# EAGLE board calculator6 (EAGLE 9.6.2)
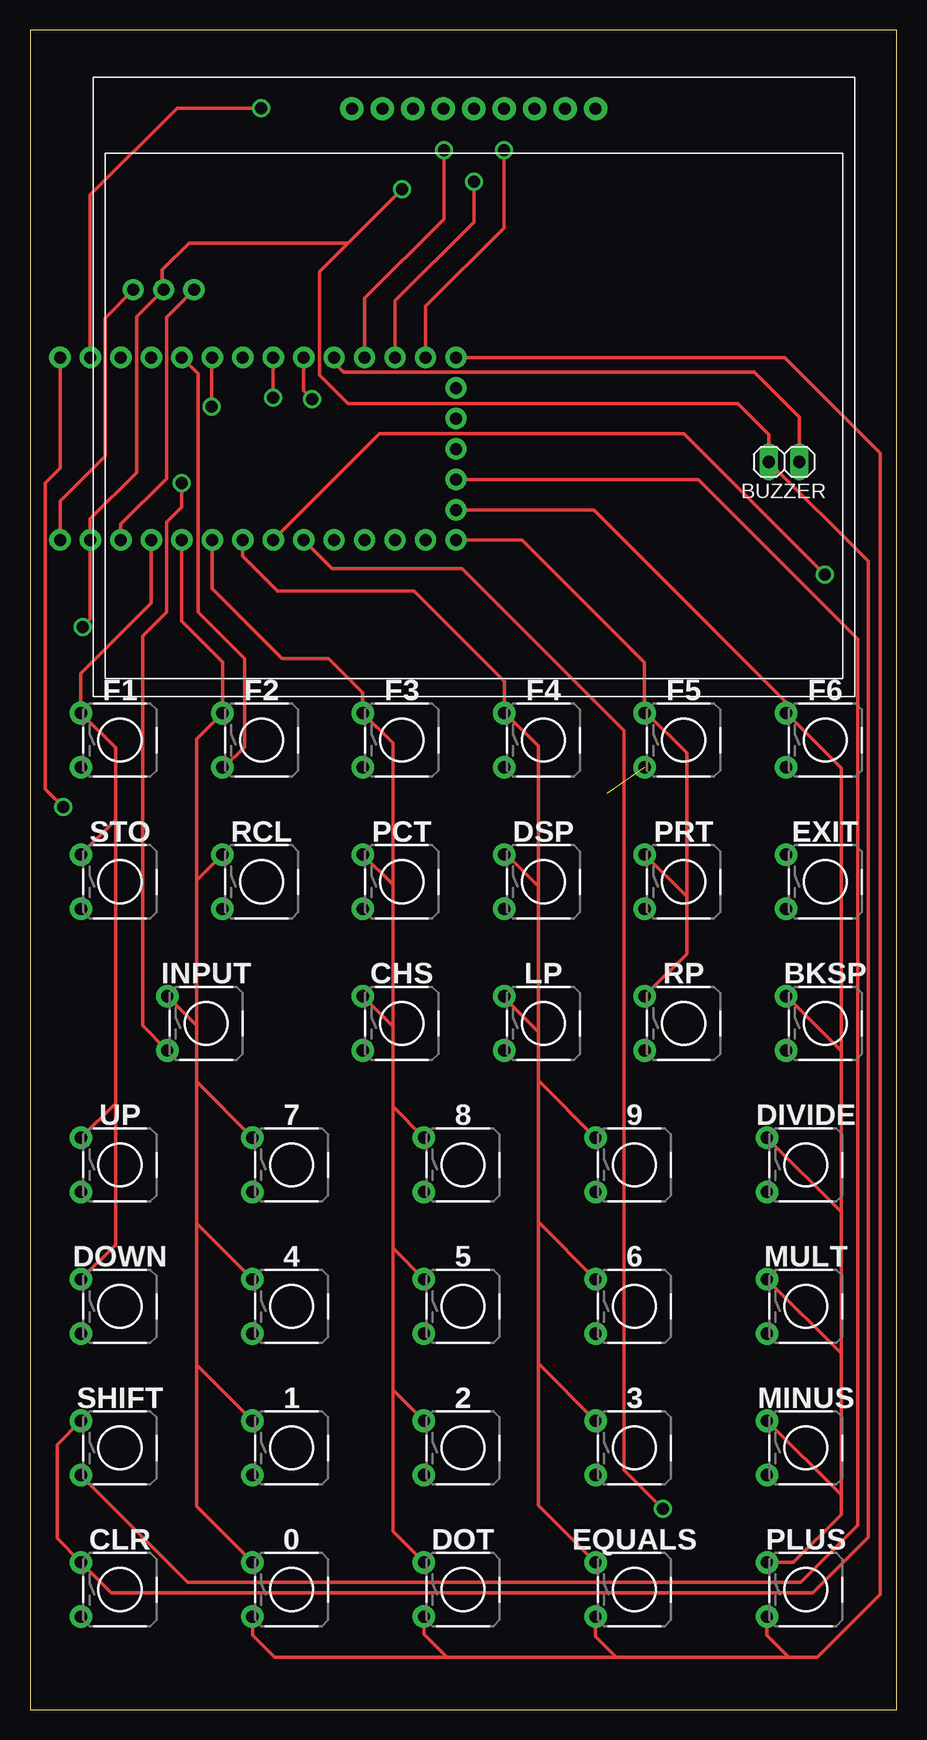
[diagram p0: board, top side]
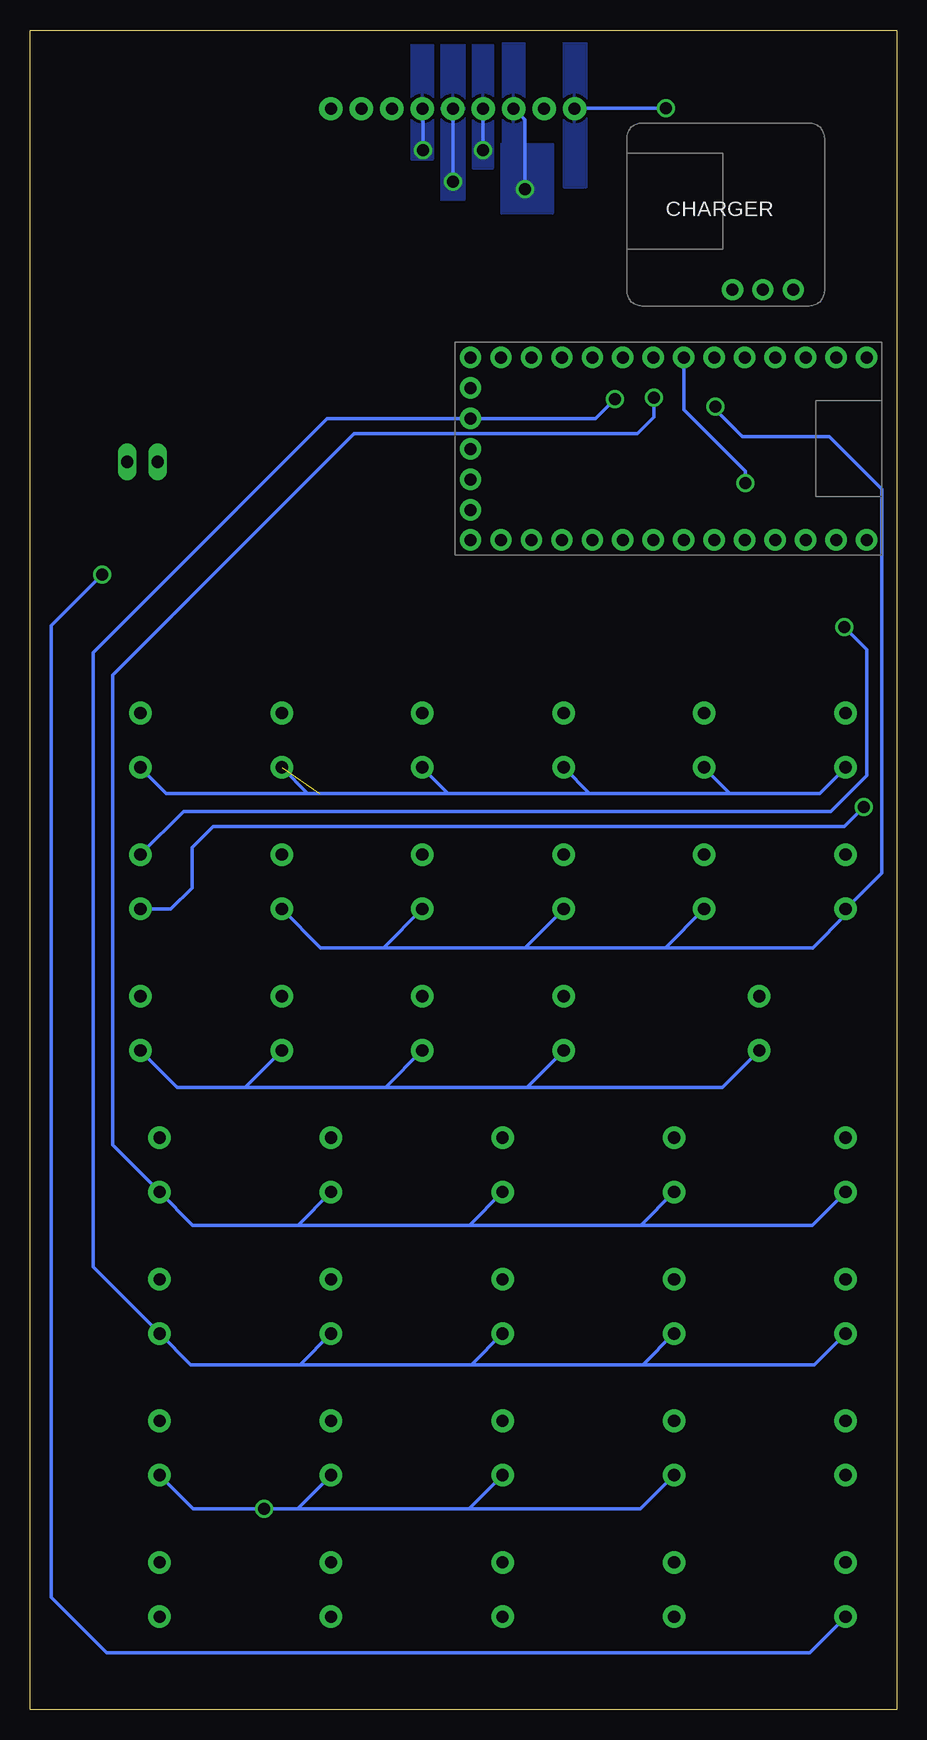
[diagram p1: board, bottom side, seen from below]

Size 72.25 x 140 mm. Coordinates in mm from the lower left corner, seen from the top.
Outline: 0,0 72.25,0 72.25,140 0,140 0,0
Copper layers (1*16): Top 0.035mm / dielectric 1.5mm / Bottom 0.035mm
Design rules "default": minimum track width 6mil, minimum drill 0.35mm, track to track 6mil, track to pad 6mil, pad to pad 6mil, via to via 6mil, smd to smd 6mil, copper to edge 40mil, drill to drill 6mil, minimum pad ring 10mil, minimum via ring 8mil, stop-mask expansion 4mil, vias tented up to drill 0mil, thermal gap 10mil

## Footprints (pad centres in the part's own frame; a part is rotated, then mirrored left to right if it is on the bottom)
BUTTON = drill 1.016 pad 1.88: 1 -3.251,2.261; 3 -3.251,-2.261
1X02 = drill 1.016 long: 1 -1.27,0; 2 1.27,0
LIPO_BACKPACK = drill 1 pad 1.778: 5V 7.68,13.9; BAT 2.6,13.9; GND 5.14,13.9
ITSYM4 = drill 1 pad 1.778: 0 34.27,16.5; 1 31.73,16.5; 2 34.27,1.3; 3 34.27,11.46; 3V3 3.79,1.3; 4 34.27,14; 5 24.11,16.5; 7 21.57,16.5; 9 19.03,16.5; 10 16.49,16.5; 11 13.95,16.5; 12 11.41,16.5; 13 8.87,16.5; A0 11.41,1.3; A1 13.95,1.3; A2 16.49,1.3; A3 19.03,1.3; A4 21.57,1.3; A5 24.11,1.3; AREF 6.33,1.3; BAT 1.25,16.5; DEBUG1 34.27,8.92; DEBUG2 34.27,6.38; EN 34.27,3.84; GND 3.79,16.5; MISO 31.73,1.3; MOSI 29.19,1.3; RST 1.25,1.3; SCK 26.65,1.3; SCL 26.65,16.5; SDA 29.19,16.5; USB 6.33,16.5; VHI 8.87,1.3
SHARPMEM = drill 1 pad 1.93: 3V3 -7.62,23.2; CLK -2.54,23.2; CS 2.54,23.2; DI 0,23.2; DISP 7.62,23.2; EIN 10.16,23.2; EMD 5.08,23.2; GND -5.08,23.2; VIN -10.16,23.2

## Placement (x,y rotation side)
0  BUTTON  [BUTTON]  21.8,10 0 top
1  BUTTON  [BUTTON]  21.8,21.8 0 top
2  BUTTON  [BUTTON]  36.1,21.8 0 top
3  BUTTON  [BUTTON]  50.4,21.8 0 top
4  BUTTON  [BUTTON]  21.8,33.6 0 top
5  BUTTON  [BUTTON]  36.1,33.6 0 top
6  BUTTON  [BUTTON]  50.4,33.6 0 top
7  BUTTON  [BUTTON]  21.8,45.4 0 top
8  BUTTON  [BUTTON]  36.1,45.4 0 top
9  BUTTON  [BUTTON]  50.4,45.4 0 top
BKSP  BUTTON  [BUTTON]  66.3,57.2 0 top
BUZZER  [1X02]  62.88,104 0 top
CHARGER  LIPO_BACKPACK  [LIPO_BACKPACK]  6,132.25 180 bottom
CHS  BUTTON  [BUTTON]  31,57.2 0 top
CLR  BUTTON  [BUTTON]  7.5,10 0 top
CONTROLLER  ITSYM4  [ITSYM4]  1.25,114 180 bottom
DIVIDE  BUTTON  [BUTTON]  64.7,45.4 0 top
DOT  BUTTON  [BUTTON]  36.1,10 0 top
DOWN  BUTTON  [BUTTON]  7.5,33.6 0 top
DSP  BUTTON  [BUTTON]  42.8,69 0 top
EQUALS  BUTTON  [BUTTON]  50.4,10 0 top
EXIT  BUTTON  [BUTTON]  66.3,69 0 top
F1  BUTTON  [BUTTON]  7.5,80.8 0 top
F2  BUTTON  [BUTTON]  19.3,80.8 0 top
F3  BUTTON  [BUTTON]  31,80.8 0 top
F4  BUTTON  [BUTTON]  42.8,80.8 0 top
F5  BUTTON  [BUTTON]  54.5,80.8 0 top
F6  BUTTON  [BUTTON]  66.3,80.8 0 top
INPUT  BUTTON  [BUTTON]  14.7,57.2 0 top
LP  BUTTON  [BUTTON]  42.8,57.2 0 top
MINUS  BUTTON  [BUTTON]  64.7,21.8 0 top
MULT  BUTTON  [BUTTON]  64.7,33.6 0 top
PCT  BUTTON  [BUTTON]  31,69 0 top
PLUS  BUTTON  [BUTTON]  64.7,10 0 top
PRT  BUTTON  [BUTTON]  54.5,69 0 top
RCL  BUTTON  [BUTTON]  19.3,69 0 top
RP  BUTTON  [BUTTON]  54.5,57.2 0 top
SHARPMEM  SHARPMEM  [SHARPMEM]  37,110.25 0 top
SHIFT  BUTTON  [BUTTON]  7.5,21.8 0 top
STO  BUTTON  [BUTTON]  7.5,69 0 top
UP  BUTTON  [BUTTON]  7.5,45.4 0 top

## Library data of the parts
0 1-9 BKSP CHARGER CHS CLR CONTROLLER DIVIDE DOT DOWN DSP EQUALS EXIT F1-F6 INPUT LP MINUS MULT PCT PLUS PRT RCL RP SHARPMEM SHIFT STO UP = aaa_pw
BUZZER = pinhead

## Nets
3V3: CONTROLLER.3V3 SHARPMEM.VIN
BAT: CHARGER.BAT CONTROLLER.BAT
BUZZER: BUZZER.2 CONTROLLER.A5
CLEAR: CLR.3 CONTROLLER.9
COL1: CONTROLLER.13 DOWN.1 F1.1 STO.1 UP.1
COL2: 0.1 1.1 4.1 7.1 CONTROLLER.12 F2.1 INPUT.1 RCL.1
COL3: 2.1 5.1 8.1 CHS.1 CONTROLLER.11 DOT.1 F3.1 PCT.1
COL4: 3.1 6.1 9.1 CONTROLLER.10 DSP.1 EQUALS.1 F4.1 LP.1
COL5: CONTROLLER.0 F5.1 PRT.1 RP.1
COL6: BKSP.1 CONTROLLER.4 DIVIDE.1 F6.1 MINUS.1 MULT.1 PLUS.1
CS: CONTROLLER.MISO SHARPMEM.CS
EXIT: CONTROLLER.RST EXIT.3
GND: BUZZER.1 CHARGER.GND CLR.1 CONTROLLER.GND EXIT.1 SHARPMEM.GND SHIFT.1
MOSI: CONTROLLER.MOSI SHARPMEM.DI
ROW1: CONTROLLER.A0 F1.3 F2.3 F3.3 F4.3 F5.3 F6.3
ROW2: CONTROLLER.A1 DSP.3 PCT.3 PRT.3 RCL.3 STO.3
ROW3: BKSP.3 CHS.3 CONTROLLER.A2 INPUT.3 LP.3 RP.3
ROW4: 7.3 8.3 9.3 CONTROLLER.A3 DIVIDE.3 UP.3
ROW5: 4.3 5.3 6.3 CONTROLLER.A4 DOWN.3 MULT.3
ROW6: 1.3 2.3 3.3 CONTROLLER.7 MINUS.3
ROW7: 0.3 CONTROLLER.2 DOT.3 EQUALS.3 PLUS.3
SCK: CONTROLLER.SCK SHARPMEM.CLK
SHIFT: CONTROLLER.3 SHIFT.3
VIN: CHARGER.5V CONTROLLER.USB

## Tracks (layer width: path | path; a pad name or v marks a point on that pad's centre or on a via)
3V3  (via drill 1 pad 1.3)
  Top 0.305: CONTROLLER.3V3 5.04,126.29 12.25,133.5 v19.25,133.5
  Bottom 0.305: v19.25,133.5 26.79,133.5 SHARPMEM.VIN
  pour Bottom: 27.75,126.88 27.75,139.75 25.88,139.75 25.88,126.88
BAT
  Top 0.305: CHARGER.BAT 6.25,116 6.25,104.5 2.5,100.75 CONTROLLER.BAT
BUZZER
  Top 0.305: CONTROLLER.A5 25.36,112.27 26.12,111.5 60.38,111.5 64.14,107.73 BUZZER.2
CLEAR  (via drill 1 pad 1.3)
  Top 0.305: CONTROLLER.9 29.16,106.38 54.5,106.38 v66.25,94.62
  Bottom 0.305: CLR.3 7.24,4.75 65.88,4.75 70.5,9.38 70.5,90.38 v66.25,94.62
COL1
  Top 0.305: CONTROLLER.13 10.12,92.25 4.25,86.37 F1.1 7.12,80.18 7.12,74.14 | DOWN.1 7.12,38.74 7.12,50.54 | 7.12,50.54 7.12,74.14 | UP.1 7.12,50.54 | STO.1 7.12,74.14
COL2
  Top 0.305: CONTROLLER.12 12.66,90.72 16.05,87.33 F2.1 13.88,80.89 13.88,69.09 | 0.1 13.88,16.93 13.88,28.73 | 13.88,28.73 13.88,40.53 | 13.88,40.53 13.88,52.33 | 13.88,52.33 13.88,57.03 | 13.88,57.03 13.88,69.09 | RCL.1 13.88,69.09 | INPUT.1 13.88,57.03 | 1.1 13.88,28.73 | 4.1 13.88,40.53 | 7.1 13.88,52.33
COL3
  Top 0.305: CONTROLLER.11 15.2,93.42 21,87.62 24.88,87.62 27.75,84.75 F3.1 30.25,80.56 30.25,68.76 | 2.1 30.25,26.66 | 30.25,26.66 30.25,38.46 | 30.25,38.46 30.25,50.26 | 30.25,50.26 30.25,57 | 30.25,57 30.25,68.76 | 5.1 30.25,38.46 | 8.1 30.25,50.26 | CHS.1 30.21,57 30.25,57 | PCT.1 30.25,68.76 | DOT.1 30.25,14.86 30.25,26.66
COL4
  Top 0.305: CONTROLLER.10 17.74,96.14 20.62,93.25 32,93.25 39.55,85.7 39.55,83.12 | 39.55,83.12 F4.1 | EQUALS.1 42.38,17.03 42.38,28.83 | 39.55,83.12 42.38,80.3 42.38,68.62 | 42.38,28.83 42.38,40.63 | 42.38,40.63 42.38,52.43 | 42.38,56.5 42.38,68.62 | 3.1 42.38,28.83 | 6.1 42.38,40.63 | 9.1 42.38,52.43 | 42.38,52.43 42.38,56.5 | 42.38,56.5 39.55,59.33 LP.1 | 42.38,68.62 39.74,71.26 DSP.1
COL5
  Top 0.305: CONTROLLER.0 41,97.5 51.25,87.25 51.25,83.25 | 51.25,83.25 F5.1 | RP.1 54.75,62.96 54.75,67.76 | 51.25,83.25 54.75,79.75 54.75,67.76 | PRT.1 54.75,67.76
COL6
  Top 0.305: CONTROLLER.4 47,100 63.05,83.95 F6.1 67.62,78.48 67.62,54.88 | PLUS.1 63.64,12.26 67.62,16.25 67.62,17.88 | 67.62,17.88 67.62,29.68 | 67.62,29.68 67.62,41.48 | 67.62,41.48 67.62,54.88 | BKSP.1 67.62,54.88 | DIVIDE.1 67.62,41.48 | MULT.1 67.62,29.68 | MINUS.1 67.62,17.88
CS  (via drill 1 pad 1.3)
  Top 0.305: CONTROLLER.MISO 32.98,116.98 39.5,123.5 v39.5,130
  Bottom 0.305: v39.5,130 39.5,133.41 SHARPMEM.CS
  pour Bottom: 38.62,129.25 38.62,138.75 40.5,138.75 40.5,129.25
EXIT  (via drill 1 pad 1.3)
  Top 0.305: CONTROLLER.RST 2.5,103.5 1.25,102.25 1.25,76.75 v2.75,75.25
  Bottom 0.305: v2.75,75.25 4.38,73.62 57,73.62 58.75,71.88 58.75,68.5 60.51,66.74 EXIT.3
GND  (via drill 1 pad 1.3)
  Top 0.305: CHARGER.GND 11.02,118.23 | 11.02,118.23 8.88,116.08 8.88,103.12 5.04,99.29 CONTROLLER.GND 5.04,90.92 v4.38,90.25 | SHIFT.1 2.25,22.06 2.25,14.26 CLR.1 6.76,9.75 65.25,9.75 69.88,14.38 69.88,95.73 BUZZER.1 61.6,106.27 59,108.88 26.5,108.88 24.12,111.25 24.12,119.88 26.5,122.25 | 26.5,122.25 13.25,122.25 11.02,120.02 11.02,118.23 | 26.5,122.25 v31,126.75
  Bottom 0.305: EXIT.1 59.43,74.88 5.5,74.88 2.5,77.88 2.5,88.38 v4.38,90.25 | SHARPMEM.GND 31,132.53 v31,126.75
  pour Bottom: 31,139.76 32.88,139.76 32.88,125 31,125
  pour Bottom: 28.62,124.75 28.62,130.5 33,130.5 33,124.75
MOSI  (via drill 1 pad 1.3)
  Top 0.305: CONTROLLER.MOSI 30.44,117.44 37,124 v37,127.38
  Bottom 0.305: v37,127.38 SHARPMEM.DI
  pour Bottom: 36,125.88 36,138.75 38,138.75 38,125.88
ROW1  (1 unrouted)
  Top 0.305: CONTROLLER.A0 14,111.36 14,91.5 17.88,87.62 17.88,80.25 16.16,78.54 F2.3
  Bottom 0.305: F6.3 60.88,76.38 48.08,76.38 | F1.3 6.41,76.38 13.88,76.38 | 37.38,76.38 49.08,76.38 F5.3 | 37.38,76.38 25.58,76.38 | 25.58,76.38 13.88,76.38 | F4.3 37.38,76.38 | F3.3 25.58,76.38 | F2.3 13.88,76.38
ROW2  (via drill 1 pad 1.3)
  Top 0.305: v15.12,108.62 15.12,112.62 CONTROLLER.A1
  Bottom 0.305: PRT.3 48.01,63.5 42.79,63.5 | 42.79,63.5 30.99,63.5 | 30.99,63.5 19.29,63.5 | 19.29,63.5 7,63.5 4.25,66.25 STO.3 1.25,69.74 1.25,101.75 5.62,106.12 12.88,106.12 15.12,108.38 v15.12,108.62 | RCL.3 19.29,63.5 | PCT.3 30.99,63.5 | DSP.3 42.79,63.5
ROW3  (via drill 1 pad 1.3)
  Top 0.305: INPUT.3 9.38,57.01 9.38,89.5 11.38,91.5 11.38,99 12.62,100.25 v12.62,102.25
  Bottom 0.305: BKSP.3 59.98,51.88 54.31,51.88 | INPUT.3 14.51,51.88 30.81,51.88 | 54.31,51.88 42.61,51.88 | 42.61,51.88 30.81,51.88 | CHS.3 30.81,51.88 | LP.3 42.61,51.88 | RP.3 54.31,51.88 | CONTROLLER.A2 17.74,108.36 12.62,103.25 v12.62,102.25
ROW4  (via drill 1 pad 1.3)
  Top 0.305: v20.25,109.38 20.25,112.67 CONTROLLER.A3
  Bottom 0.305: UP.3 7.01,40.38 21.31,40.38 | 49.91,40.38 58.68,40.38 DIVIDE.3 65.38,47.07 65.38,86.25 45.25,106.38 21.62,106.38 20.25,107.75 v20.25,109.38 | 49.91,40.38 35.61,40.38 | 35.61,40.38 21.31,40.38 | 7.3 21.31,40.38 | 8.3 35.61,40.38 | 9.3 49.91,40.38
ROW5  (via drill 1 pad 1.3)
  Top 0.305: v23.5,109.25 22.82,109.93 CONTROLLER.A4
  Bottom 0.305: 21.14,28.75 4.3 | 49.74,28.75 58.86,28.75 MULT.3 67,36.89 67,88.12 47.5,107.62 25.12,107.62 v23.5,109.25 | 49.74,28.75 35.44,28.75 | 35.44,28.75 21.14,28.75 | 5.3 35.44,28.75 | 6.3 49.74,28.75 | DOWN.3 6.84,28.75 21.14,28.75
ROW6  (via drill 1 pad 1.3)
  Top 0.305: CONTROLLER.7 25.2,95.12 36,95.12 49.5,81.62 49.5,20 v52.75,16.75
  Bottom 0.305: MINUS.3 58.66,16.75 v52.75,16.75 49.94,16.75 | 1.3 21.34,16.75 35.64,16.75 | 49.94,16.75 35.64,16.75 | 3.3 49.94,16.75 | 2.3 35.64,16.75
ROW7
  Top 0.305: CONTROLLER.2 62.92,112.7 70.88,104.75 70.88,9.62 65.62,4.38 63.25,4.38 | 63.25,4.38 48.88,4.38 | 48.88,4.38 34.75,4.38 | 34.75,4.38 20.38,4.38 18.55,6.2 0.3 | DOT.3 32.85,6.28 34.75,4.38 | EQUALS.3 47.15,6.1 48.88,4.38 | PLUS.3 61.45,6.18 63.25,4.38
SCK  (via drill 1 pad 1.3)
  Top 0.305: CONTROLLER.SCK 27.9,117.65 34.5,124.25 v34.5,130
  Bottom 0.305: v34.5,130 34.5,133.41 SHARPMEM.CLK
  pour Bottom: 33.62,128.5 33.62,138.75 35.38,138.75 35.38,128.5
SHIFT
  Top 0.305: SHIFT.3 13.16,10.62 64.25,10.62 69,15.38 69,89.25 55.71,102.54 CONTROLLER.3
VIN
  Top 0.305: CHARGER.5V 11.38,116.05 11.38,102.62 7.58,98.83 CONTROLLER.USB